# Altium PCB Circadian2-V2.PcbDoc
Units mm, origin at the board's own origin, x right, y up, seen from the top; angles counter-clockwise.
Board outline 27 x 50 mm, 2 copper layers (Top Layer, Bottom Layer), stack 0.571 mm thick; 30 components, 29 nets, 459 pads, 7 vias.
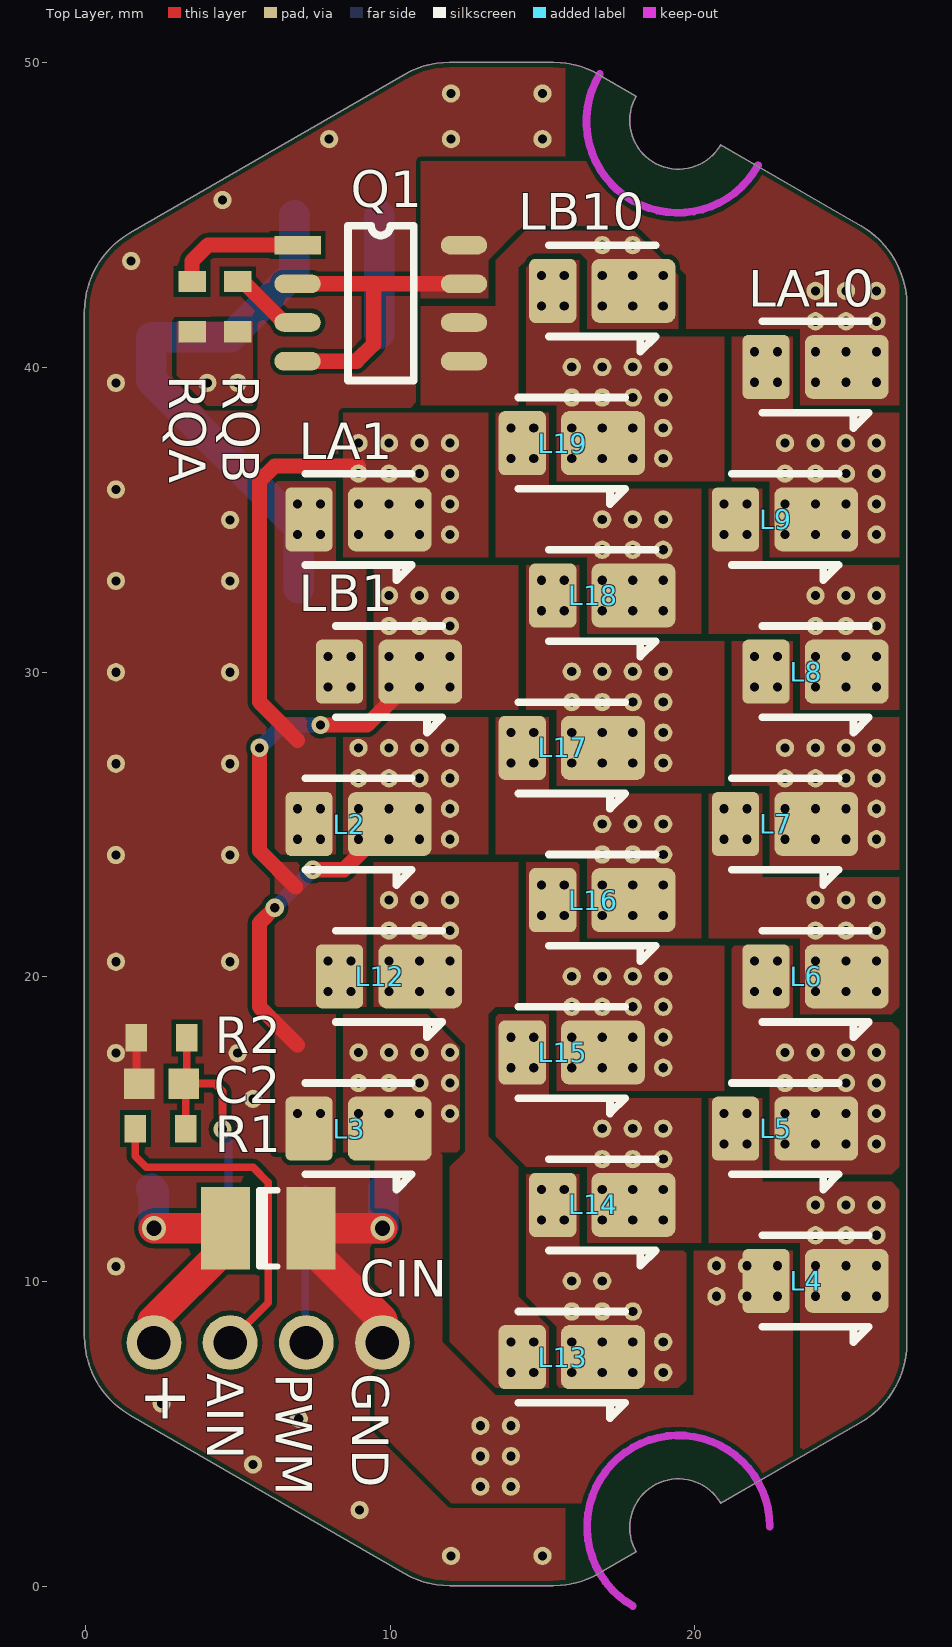
[diagram p0: Top Layer view]
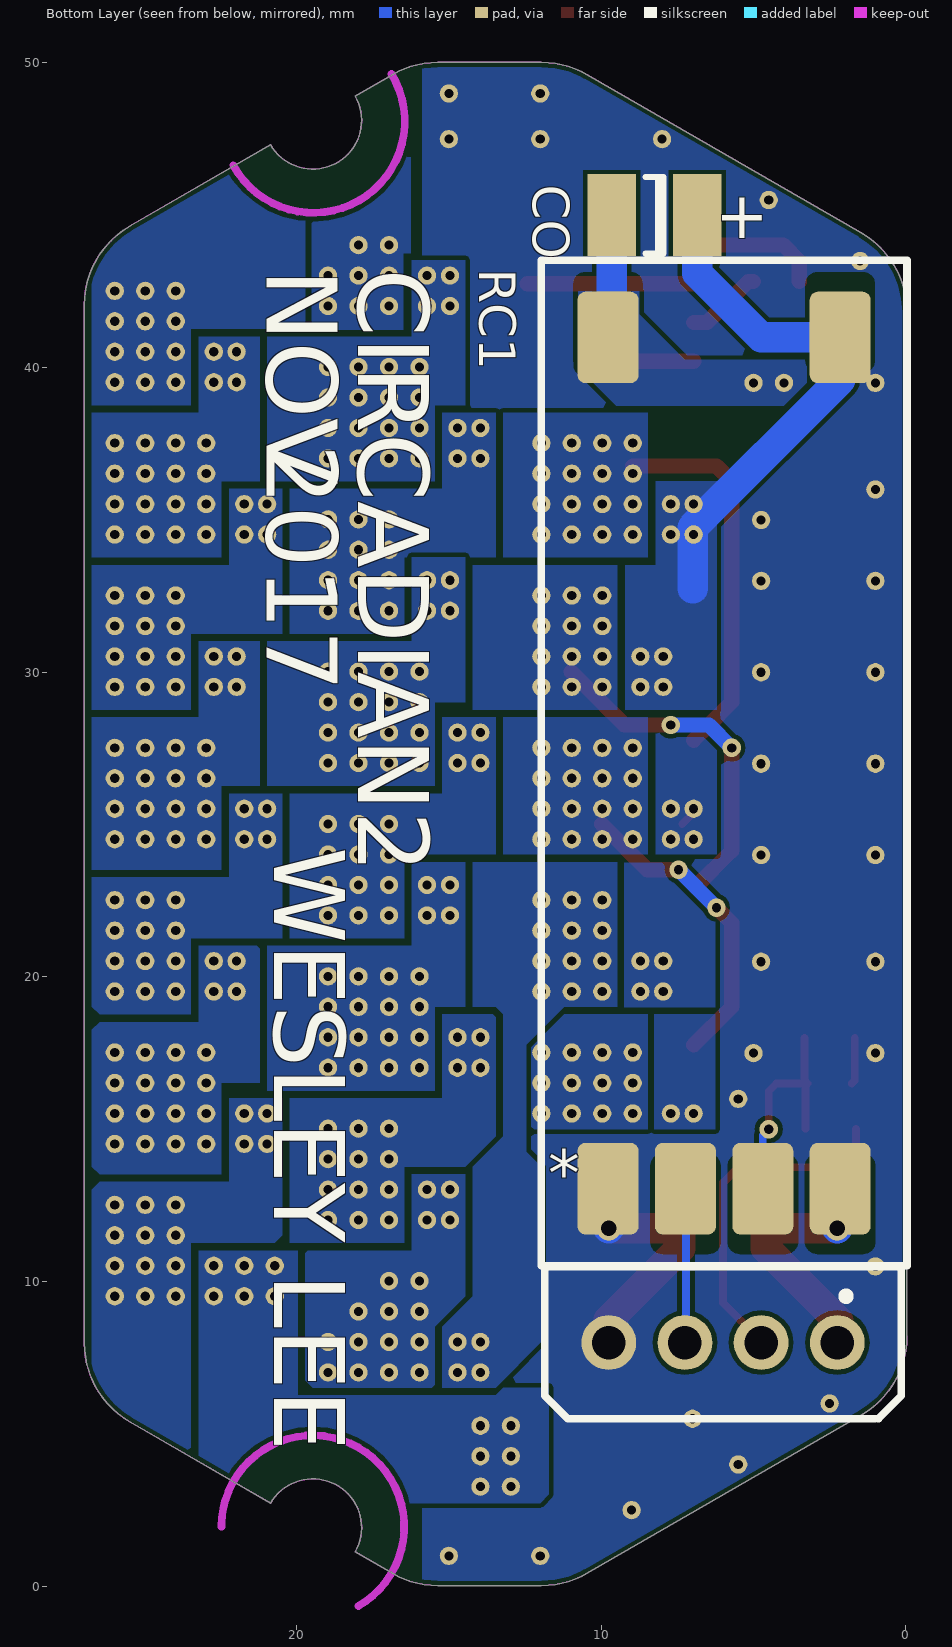
[diagram p1: Bottom Layer view, seen from below]
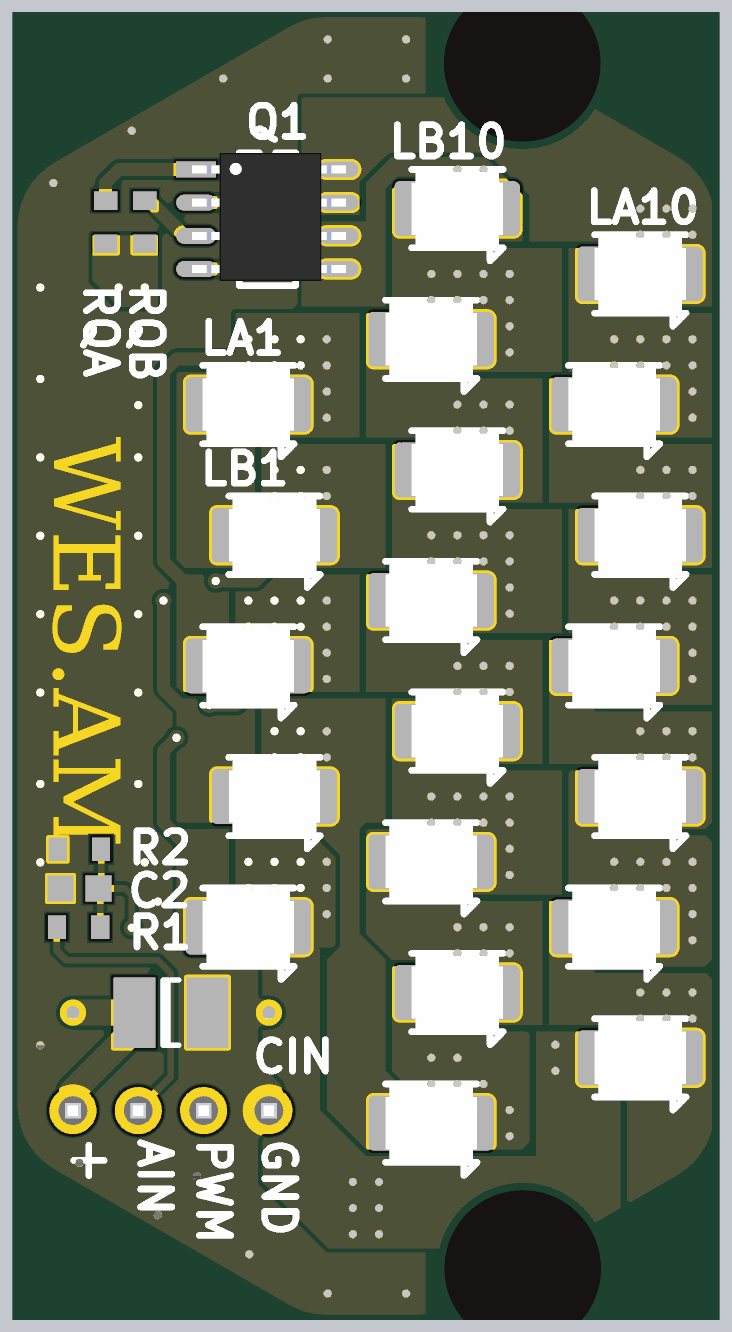
[diagram p2: 3D render of the assembled board from above, using the file's embedded part models]

## Layer stack, top to bottom
Top Solder: solder mask 0.0102, Solder Resist, Dk 3.5
Top Layer: signal copper 0.0356
Dielectric 1: dielectric 0.5, FR-4, Dk 4.8
Bottom Layer: signal copper 0.0356
Bottom Solder: solder mask 0.0102, Solder Resist, Dk 3.5

## Board outline
1.464,5.618 10.464,0.422 ccw(c11.964,3.02) 11.964,0.02 15.356,0.02 ccw(c15.356,3.02) 16.856,0.422 18.078,1.128 cw(c19.464,1.928) 20.85,2.728 25.464,5.392 ccw(c23.964,7.99) 26.964,7.99 26.964,42.051 ccw(c23.964,42.051) 25.464,44.649 20.85,47.313 cw(c19.464,48.113) 18.078,48.913 16.856,49.618 ccw(c15.356,47.02) 15.356,50.02 11.964,50.02 ccw(c11.964,47.02) 10.464,49.618 1.464,44.422 ccw(c2.964,41.824) -0.036,41.824 -0.036,8.217 ccw(c2.964,8.217)

## Design rules (kind name [scope] priority, off if disabled: settings)
Clearance [All] p1: gap=0.15
PolygonConnect [All] p1: connectstyle=Direct reliefconductorwidth=0.254 reliefentries=4 polygonreliefangle="90 Angle" airgapwidth=0.254
RoutingVias [All] p1: holewidth=0.3 width=0.3 viastyle="Through Hole" minholewidth=0.3 minwidth=0 maxholewidth=5 maxwidth=5
SolderMaskExpansion [All] p1: expansion=0.102 soldermaskfromhole=TRUE
Width [All] p1: maxlimit=1 minlimit=0.152 preferedwidth=0.254
30 further rules are at their usual default settings.

## Components (designator, comment, footprint, x,y, rotation, side; value= is the part's Value field where it differs from the comment)
* "PTSM 4 Way" "PTSM - 4 Way Vertical" 6,8 r180 bottom
C2 "100nF" CAP_SM0603_YAGEOCC2_N 2.5,16.5 r180 top
CIN "C1210" 1210 6,11.75 r0 top (schematic designator C1)
CO "C1210" 1210 8.25,45 r0 bottom
L2 "GW JTLPS1" E2835 8.964,25.02 r180 top
L3 "GW JTLPS1" E2835 8.964,15.02 r180 top
L4 "GW JTLPS1" E2835 23.964,10.02 r180 top
L5 "GW JTLPS1" E2835 22.964,15.02 r180 top
L6 "GW JTLPS1" E2835 23.964,20.02 r180 top
L7 "GW JTLPS1" E2835 22.964,25.02 r180 top
L8 "GW JTLPS1" E2835 23.964,30.02 r180 top
L9 "GW JTLPS1" E2835 22.964,35.02 r180 top
L12 "GW JTLPS1" E2835 9.964,20.02 r180 top
L13 "GW JTLPS1" E2835 15.964,7.52 r180 top
L14 "GW JTLPS1" E2835 16.964,12.52 r180 top
L15 "GW JTLPS1" E2835 15.964,17.52 r180 top
L16 "GW JTLPS1" E2835 16.964,22.52 r180 top
L17 "GW JTLPS1" E2835 15.964,27.52 r180 top
L18 "GW JTLPS1" E2835 16.964,32.52 r180 top
L19 "GW JTLPS1" E2835 15.964,37.52 r180 top
LA1 "GW JTLPS1" E2835 8.964,35.02 r180 top (schematic designator L1)
LA10 "GW JTLPS1" E2835 23.964,40.02 r180 top (schematic designator L10)
LB1 "GW JTLPS1" E2835 9.964,30.02 r180 top (schematic designator L11)
LB10 "LED" E2835 16.964,42.52 r180 top (schematic designator L20)
Q1 "NSS40301" SOIC8 6.964,44.02 r0 top
R1 "10R" RES_SM0603_YAGEORC_N 2.464,15.02 r180 top
R2 "10R" RES_SM0603_YAGEORC_N 2.5,18 r0 top
RC1 "RCD-24PL_01" RCD-24PL_01 5.964,27.02 r90 bottom locked
RQA "10R" RES_SM0603_YAGEORC_N 3.5,42 r90 top
RQB "10R" RES_SM0603_YAGEORC_N 5,42 r90 top

## Footprints (in the part's own frame and the unit in brackets; to place one, negate y for a bottom-side part, rotate by r counter-clockwise, add the part's x,y. Pads: shape width x height; smd on the part's side, far side on the other; paste and mask are expansions set on the pad)
1210 [mm] "Chip Capacitor; Body 3.2 x 2.5 mm (LxW typ)"
  rect 1.6x2.7 smd: 1(-1.4,0) 2(1.4,0)
  silkscreen extent -0.3,-1.25 0.3,1.25
CAP_SM0603_YAGEOCC2_N [mm] "Capacitor, Yageo CC Class2, SM0603, IPC Medium Density"
  rect 1x1 smd: 1(-0.727,0) 2(0.727,0)
  body extent -0.9,-0.5 0.9,0.5, height 0.9
E2835 [mm] "E2835"
  rrect25% 2.75x2.1 smd: 1(-1.025,0)
  rrect25% 1.55x2.1 smd: 2(1.625,0)
  silkscreen extent -1.75,-1.5 1.75,2, body extent -1.75,-1.4 1.75,1.4, height 0.65
"PTSM - 4 Way Vertical" [mm] "Through Hole 1778573"
  round 1.8 hole 1.1: 1(-3.75,0) 2(-1.25,0) 3(1.25,0) 4(3.75,0)
  silkscreen extent -5.85,-2.5 5.85,2.5, body extent -5.85,-4.3 5.85,4.3, height 8.7
RCD-24PL_01 [mm] "Recom LED Driver"
  rrect25% 3x2 smd: 1(-13.97,-3.81) 2(-13.97,-1.27) 3(-13.97,1.27) 4(-13.97,3.81) 5(13.97,-3.81) 6(13.97,3.81)
  silkscreen extent -17.63,-6 16.5,6, body extent -15.5,-5.7 15.5,5.7, height 5.6
RES_SM0603_YAGEORC_N [mm] "Resistor, Yageo RC_L, SM0603, IPC Medium Density"
  rect 0.7x0.9 smd: 1(-0.827,0) 2(0.827,0)
  body extent -0.85,-0.45 0.85,0.45, height 0.55
SOIC8 [mil]
  rect 60x24 smd: 1(0,0)
  oval 60x24 smd: 2(0,-50) 3(0,-100) 4(0,-150) 5(215,-150) 6(215,-100) 7(215,-50) 8(215,0)
  silkscreen extent 65,-175 150,25, body extent -6,-168 226,25, height 55

## Part data
C2: library part CC0603KRX7R9BB104, "CAP 100nF SM0603 X7R 50V YAGEO CC2"
CIN CO: "Ceramic Chip Capacitor - Standard"
L2 L3 L4 L5 L6 L7 L8 L9 L12 L13 L14 L15 L16 L17 L18 L19 LA1 LA10 LB1: library part "GW JTLPS1.CM LED", "Osram LED"
LB10: "Osram LED"
R1 R2 RQA RQB: library part RC0603FR-0710RL, "RES 10R SM0603 YAGEO RC_L"

## Free pads (board coordinates)
  round 0.6 hole 0.3: 2(8.964,24.52) 2(8.964,34.52) 2(9.964,24.52) 2(9.964,34.52) 2(15.964,7.02) 2(15.964,17.02) 2(15.964,27.02) 2(15.964,37.02) 2(16.964,7.02) 2(16.964,17.02) 2(16.964,27.02) 2(16.964,37.02) 2(22.964,14.52) 2(22.964,24.52) 2(22.964,34.52) 2(23.964,14.52) 2(23.964,24.52) 2(23.964,34.52) 3(10.964,24.52) 3(10.964,34.52) 3(17.964,7.02) 3(17.964,17.02) 3(17.964,27.02) 3(17.964,37.02) 3(18.964,27.02) 3(18.964,37.02) 3(24.964,14.52) 3(24.964,24.52) 3(24.964,34.52) 4(10.964,15.52) 4(10.964,25.52) 4(10.964,35.52) 4(17.964,8.02) 4(17.964,18.02) 4(17.964,28.02) 4(17.964,38.02) 4(18.964,28.02) 4(18.964,38.02) 4(24.964,15.52) 4(24.964,25.52) 4(24.964,35.52) 5(9.964,15.52) 5(9.964,25.52) 5(9.964,35.52) 5(16.964,8.02) 5(16.964,18.02) 5(16.964,28.02) 5(16.964,38.02) 5(23.964,15.52) 5(23.964,25.52) 5(23.964,35.52) 6(8.964,15.52) 6(8.964,25.52) 6(8.964,35.52) 6(15.964,8.02) 6(15.964,18.02) 6(15.964,28.02) 6(15.964,38.02) 6(22.964,15.52) 6(22.964,25.52) 6(22.964,35.52) 7(8.964,16.52) 7(8.964,26.52) 7(8.964,36.52) 7(15.964,9.02) 7(15.964,19.02) 7(15.964,29.02) 7(15.964,39.02) 7(22.964,16.52) 7(22.964,26.52) 7(22.964,36.52) 8(9.964,16.52) 8(9.964,26.52) 8(9.964,36.52) 8(16.964,9.02) 8(16.964,19.02) 8(16.964,29.02) 8(16.964,39.02) 8(23.964,16.52) 8(23.964,26.52) 8(23.964,36.52) 9(10.964,16.52) 9(10.964,26.52) 9(10.964,36.52) 9(17.964,9.02) 9(17.964,19.02) 9(17.964,29.02) 9(17.964,39.02) 9(18.964,29.02) 9(18.964,39.02) 9(24.964,16.52) 9(24.964,26.52) 9(24.964,36.52) 10(7.964,19.52) 10(7.964,29.52) 10(14.964,22.02) 10(14.964,32.02) 10(14.964,42.02) 11(7.964,20.52) 11(7.964,30.52) 11(14.964,23.02) 11(14.964,33.02) 11(14.964,43.02) 12(8.714,20.52) 12(8.714,30.52) 12(15.714,23.02) 12(15.714,33.02) 12(15.714,43.02) 13(8.714,19.52) 13(8.714,29.52) 13(15.714,22.02) 13(15.714,32.02) 13(15.714,42.02) 14(8.964,17.52) 14(8.964,27.52) 14(8.964,37.52) 14(15.964,10.02) 14(15.964,20.02) 14(15.964,30.02) 14(15.964,40.02) 14(21.964,19.52) 14(21.964,20.52) 14(21.964,29.52) 14(21.964,30.52) 14(21.964,39.52) 14(21.964,40.52) 14(22.714,19.52) 14(22.714,20.52) 14(22.714,29.52) 14(22.714,30.52) 14(22.714,39.52) 14(22.714,40.52) 14(22.964,17.52) 14(22.964,27.52) 14(22.964,37.52) 15(9.964,17.52) 15(9.964,27.52) 15(9.964,37.52) 15(16.964,10.02) 15(16.964,20.02) 15(16.964,30.02) 15(16.964,40.02) 15(23.964,17.52) 15(23.964,27.52) 15(23.964,37.52) 16(10.964,17.52) 16(10.964,27.52) 16(10.964,37.52) 16(11.964,15.52) 16(11.964,16.52) 16(11.964,17.52) 16(11.964,24.52) 16(11.964,25.52) 16(11.964,26.52) 16(11.964,27.52) 16(11.964,34.52) 16(11.964,35.52) 16(11.964,36.52) 16(11.964,37.52) 16(14.964,12.02) 16(14.964,13.02) 16(15.714,12.02) 16(15.714,13.02) 16(17.964,20.02) 16(17.964,30.02) 16(17.964,40.02) 16(18.964,7.02) 16(18.964,8.02) 16(18.964,17.02) 16(18.964,18.02) 16(18.964,19.02) 16(18.964,20.02) 16(18.964,30.02) 16(18.964,40.02) 16(24.964,17.52) 16(24.964,27.52) 16(24.964,37.52) 16(25.964,14.52) 16(25.964,15.52) 16(25.964,16.52) 16(25.964,17.52) 16(25.964,24.52) 16(25.964,25.52) 16(25.964,26.52) 16(25.964,27.52) 16(25.964,34.52) 16(25.964,35.52) 16(25.964,36.52) 16(25.964,37.52) 17(9.964,19.52) 17(9.964,29.52) 17(12.964,3.27) 17(12.964,4.27) 17(12.964,5.27) 17(13.964,3.27) 17(13.964,4.27) 17(13.964,5.27) 17(16.964,42.02) 17(16.964,12.02) 17(16.964,22.02) 17(16.964,32.02) 17(20.714,9.52) 17(20.714,10.52) 17(21.714,9.52) 17(21.714,10.52) 17(22.714,9.52) 17(22.714,10.52) 17(23.964,9.52) 17(23.964,19.52) 17(23.964,29.52) 17(23.964,39.52) 18(9.964,20.52) 18(9.964,30.52) 18(16.964,43.02) 18(16.964,13.02) 18(16.964,23.02) 18(16.964,33.02) 18(23.964,10.52) 18(23.964,20.52) 18(23.964,30.52) 18(23.964,40.52) 19(10.964,20.52) 19(10.964,30.52) 19(17.964,43.02) 19(17.964,13.02) 19(17.964,23.02) 19(17.964,33.02) 19(24.964,10.52) 19(24.964,20.52) 19(24.964,30.52) 19(24.964,40.52) 20(10.964,19.52) 20(10.964,29.52) 20(17.964,42.02) 20(17.964,12.02) 20(17.964,22.02) 20(17.964,32.02) 20(24.964,9.52) 20(24.964,19.52) 20(24.964,29.52) 20(24.964,39.52) 21(11.964,19.52) 21(11.964,29.52) 21(18.964,42.02) 21(18.964,12.02) 21(18.964,22.02) 21(18.964,32.02) 21(25.964,9.52) 21(25.964,19.52) 21(25.964,29.52) 21(25.964,39.52) 22(11.964,20.52) 22(11.964,30.52) 22(18.964,43.02) 22(18.964,13.02) 22(18.964,23.02) 22(18.964,33.02) 22(25.964,10.52) 22(25.964,20.52) 22(25.964,30.52) 22(25.964,40.52) 23(10.964,21.52) 23(10.964,31.52) 23(17.964,44.02) 23(17.964,14.02) 23(17.964,24.02) 23(17.964,34.02) 23(24.964,11.52) 23(24.964,21.52) 23(24.964,31.52) 23(24.964,41.52) 24(9.964,21.52) 24(9.964,31.52) 24(16.964,44.02) 24(16.964,14.02) 24(16.964,24.02) 24(16.964,34.02) 24(23.964,11.52) 24(23.964,21.52) 24(23.964,31.52) 24(23.964,41.52) 25(11.964,21.52) 25(11.964,31.52) 25(18.964,14.02) 25(18.964,24.02) 25(18.964,34.02) 25(25.964,11.52) 25(25.964,21.52) 25(25.964,31.52) 25(25.964,41.52) 26(6.964,15.52) 26(6.964,24.52) 26(6.964,25.52) 26(6.964,34.52) 26(6.964,35.52) 26(7.714,15.52) 26(7.714,24.52) 26(7.714,25.52) 26(7.714,34.52) 26(7.714,35.52) 26(9.964,22.52) 26(9.964,32.52) 26(14.714,27.02) 26(14.714,28.02) 26(14.714,17.02) 26(14.714,18.02) 26(14.714,37.02) 26(14.714,38.02) 26(16.964,15.02) 26(16.964,25.02) 26(16.964,35.02) 26(20.964,14.52) 26(20.964,15.52) 26(20.964,24.52) 26(20.964,25.52) 26(20.964,34.52) 26(20.964,35.52) 26(21.714,14.52) 26(21.714,15.52) 26(21.714,24.52) 26(21.714,25.52) 26(21.714,34.52) 26(21.714,35.52) 26(23.964,12.52) 26(23.964,22.52) 26(23.964,32.52) 26(23.964,42.52) 27(10.964,22.52) 27(10.964,32.52) 27(17.964,15.02) 27(17.964,25.02) 27(17.964,35.02) 27(24.964,12.52) 27(24.964,22.52) 27(24.964,32.52) 27(24.964,42.52) 28(11.964,22.52) 28(11.964,32.52) 28(18.964,15.02) 28(18.964,25.02) 28(18.964,35.02) 28(25.964,12.52) 28(25.964,22.52) 28(25.964,32.52) 28(25.964,42.52) 31(13.964,7.02) 31(13.964,17.02) 31(13.964,27.02) 31(13.964,37.02) 32(13.964,8.02) 32(13.964,18.02) 32(13.964,28.02) 32(13.964,38.02) 32(14.714,7.02) 32(14.714,8.02) 33(4,39.5) 34(5,39.5) 44(15,49) 45(12,49) 47(8,47.5) 48(4.5,45.5) 49(1.5,43.5) 50(1,39.5) 51(1,36) 52(1,33) 53(1,30) 54(1,27) 55(1,24) 56(1,20.5) 57(1,17.5) 58(1,10.5) 59(2.5,6) 60(5.5,4) 61(9,2.5) 62(12,1) 63(15,1) 64(7,5.5) 65(4.75,20.5) 66(4.75,24) 67(4.75,27) 68(4.75,30) 69(4.75,33) 70(4.75,35) 71(15,47.5) 72(12,47.5) 73(5,17.5) 74(5.5,16)

## Via types
v1: diameter 0.6, hole 0.3, Top Layer to Bottom Layer, tented both sides, 5 vias
v2: diameter 0.8, hole 0.5, Top Layer to Bottom Layer, 2 vias

## Nets (pads, with @x,y where several pads share a name; then routed paths per layer and width w, separated by ;. In a path a pad name is that pad's centre, name@x,y a point inside that pad or via, vN(x,y) a via of type N, cw(c..) or ccw(c..) an arc to the next point about the centre after c; other vN are vias at no path point)
AIN: *.3 R1.2 | length 11.4
  Top Layer w0.254: R1.2 1.637,14.113 2,13.75 5.5,13.75 6,13.25 6,9.306 *.3@4.714,8.02
GND: *.1 C2.2 CIN.2 pad.44 pad.45 pad.47 pad.48 pad.49 pad.50 pad.51 pad.52 pad.53 pad.54 pad.55 pad.56 pad.57 pad.58 pad.59 pad.60 pad.61 pad.62 pad.63 pad.64 pad.65 pad.66 pad.67 pad.68 pad.69 pad.70 pad.71 pad.72 pad.73 pad.74 R2.1 RC1.4 | length 9.9
  Top Layer w0.254: R2.1 1.673,16.6 C2.2
  Top Layer w1: *.1@9.714,8.02 9.714,8.714 9.75,8.75 7.4,11.1 CIN.2 v2(9.75,11.75)
  Bottom Layer w1: v2(9.75,11.75) 9.774,11.774 RC1.4
LEDVOUT+: CO.1 LA1.2 LB1.2 pad.10@7.964,29.52 pad.11@7.964,30.52 pad.12@8.714,30.52 pad.13@8.714,29.52 pad.26@6.964,34.52 pad.26@6.964,35.52 pad.26@7.714,34.52 pad.26@7.714,35.52 RC1.5 | length 17.7
  Bottom Layer w1: CO.1 6.85,43.1 4.75,41 2.164,41 RC1.5 2.154,39.596 7,34.75 7,32.75
LEDVOUT-: CO.2 pad.33 pad.34 RC1.6 RQA.1 RQB.1 | length 4.1
  Bottom Layer w0.254: RC1.6@9.65,41.114 RC1.6
  Bottom Layer w1: RC1.6@9.65,41.114 CO.2
NetC2_1: C2.1 R1.1 R2.2 RC1.2 | length 7.7
  Top Layer w0.254: R1.1 3.291,16.436 C2.1 ; R2.2 3.327,16.6 C2.1 ; v1(4.5,15) 4.5,16.25 4.25,16.5 C2.1
  Bottom Layer w0.254: v1(4.5,15) 4.694,14.806 RC1.2
NetL2_1: L2.1 L3.2 pad.2@8.964,24.52 pad.2@9.964,24.52 pad.3@10.964,24.52 pad.4@10.964,25.52 pad.5@9.964,25.52 pad.6@8.964,25.52 pad.7@8.964,26.52 pad.8@9.964,26.52 pad.9@10.964,26.52 pad.14@8.964,27.52 pad.15@9.964,27.52 pad.16@10.964,27.52 pad.16@11.964,24.52 pad.16@11.964,25.52 pad.16@11.964,26.52 pad.16@11.964,27.52 pad.26@6.964,15.52 pad.26@7.714,15.52 | length 10.1
  Top Layer w0.5: v1(6.214,22.27) 5.714,21.77 5.714,19.02 6.964,17.77 ; v1(7.464,23.52) 8.489,23.52 L2.1
  Bottom Layer w0.5: v1(6.214,22.27) v1(7.464,23.52)
NetL2_2: L2.2 LA1.1 pad.2@8.964,34.52 pad.2@9.964,34.52 pad.3@10.964,34.52 pad.4@10.964,35.52 pad.5@9.964,35.52 pad.6@8.964,35.52 pad.7@8.964,36.52 pad.8@9.964,36.52 pad.9@10.964,36.52 pad.14@8.964,37.52 pad.15@9.964,37.52 pad.16@10.964,37.52 pad.16@11.964,34.52 pad.16@11.964,35.52 pad.16@11.964,36.52 pad.16@11.964,37.52 pad.26@6.964,24.52 pad.26@6.964,25.52 pad.26@7.714,24.52 pad.26@7.714,25.52 | length 13.1
  Top Layer w0.254: L2.2@6.964,25.52 6.964,25.395 L2.2
  Top Layer w0.5: 6.964,27.77 6.464,28.27 5.714,29.02 5.714,36.27 6.214,36.77 pad.7@8.964,36.77
NetL3_1: L3.1 L4.2 pad.4@10.964,15.52 pad.5@9.964,15.52 pad.6@8.964,15.52 pad.7@8.964,16.52 pad.8@9.964,16.52 pad.9@10.964,16.52 pad.14@8.964,17.52 pad.15@9.964,17.52 pad.16@10.964,17.52 pad.16@11.964,15.52 pad.16@11.964,16.52 pad.16@11.964,17.52 pad.17@12.964,3.27 pad.17@12.964,4.27 pad.17@12.964,5.27 pad.17@13.964,3.27 pad.17@13.964,4.27 pad.17@13.964,5.27 pad.17@20.714,9.52 pad.17@20.714,10.52 pad.17@21.714,9.52 pad.17@21.714,10.52 pad.17@22.714,9.52 pad.17@22.714,10.52
NetL4_1: L4.1 L5.2 pad.17@23.964,9.52 pad.18@23.964,10.52 pad.19@24.964,10.52 pad.20@24.964,9.52 pad.21@25.964,9.52 pad.22@25.964,10.52 pad.23@24.964,11.52 pad.24@23.964,11.52 pad.25@25.964,11.52 pad.26@20.964,14.52 pad.26@20.964,15.52 pad.26@21.714,14.52 pad.26@21.714,15.52 pad.26@23.964,12.52 pad.27@24.964,12.52 pad.28@25.964,12.52
NetL5_1: L5.1 L6.2 pad.2@22.964,14.52 pad.2@23.964,14.52 pad.3@24.964,14.52 pad.4@24.964,15.52 pad.5@23.964,15.52 pad.6@22.964,15.52 pad.7@22.964,16.52 pad.8@23.964,16.52 pad.9@24.964,16.52 pad.14@21.964,19.52 pad.14@21.964,20.52 pad.14@22.714,19.52 pad.14@22.714,20.52 pad.14@22.964,17.52 pad.15@23.964,17.52 pad.16@24.964,17.52 pad.16@25.964,14.52 pad.16@25.964,15.52 pad.16@25.964,16.52 pad.16@25.964,17.52
NetL6_1: L6.1 L7.2 pad.17@23.964,19.52 pad.18@23.964,20.52 pad.19@24.964,20.52 pad.20@24.964,19.52 pad.21@25.964,19.52 pad.22@25.964,20.52 pad.23@24.964,21.52 pad.24@23.964,21.52 pad.25@25.964,21.52 pad.26@20.964,24.52 pad.26@20.964,25.52 pad.26@21.714,24.52 pad.26@21.714,25.52 pad.26@23.964,22.52 pad.27@24.964,22.52 pad.28@25.964,22.52
NetL7_1: L7.1 L8.2 pad.2@22.964,24.52 pad.2@23.964,24.52 pad.3@24.964,24.52 pad.4@24.964,25.52 pad.5@23.964,25.52 pad.6@22.964,25.52 pad.7@22.964,26.52 pad.8@23.964,26.52 pad.9@24.964,26.52 pad.14@21.964,29.52 pad.14@21.964,30.52 pad.14@22.714,29.52 pad.14@22.714,30.52 pad.14@22.964,27.52 pad.15@23.964,27.52 pad.16@24.964,27.52 pad.16@25.964,24.52 pad.16@25.964,25.52 pad.16@25.964,26.52 pad.16@25.964,27.52
NetL8_1: L8.1 L9.2 pad.17@23.964,29.52 pad.18@23.964,30.52 pad.19@24.964,30.52 pad.20@24.964,29.52 pad.21@25.964,29.52 pad.22@25.964,30.52 pad.23@24.964,31.52 pad.24@23.964,31.52 pad.25@25.964,31.52 pad.26@20.964,34.52 pad.26@20.964,35.52 pad.26@21.714,34.52 pad.26@21.714,35.52 pad.26@23.964,32.52 pad.27@24.964,32.52 pad.28@25.964,32.52
NetL9_1: L9.1 LA10.2 pad.2@22.964,34.52 pad.2@23.964,34.52 pad.3@24.964,34.52 pad.4@24.964,35.52 pad.5@23.964,35.52 pad.6@22.964,35.52 pad.7@22.964,36.52 pad.8@23.964,36.52 pad.9@24.964,36.52 pad.14@21.964,39.52 pad.14@21.964,40.52 pad.14@22.714,39.52 pad.14@22.714,40.52 pad.14@22.964,37.52 pad.15@23.964,37.52 pad.16@24.964,37.52 pad.16@25.964,34.52 pad.16@25.964,35.52 pad.16@25.964,36.52 pad.16@25.964,37.52
NetL12_1: L12.1 L13.2 pad.17@9.964,19.52 pad.18@9.964,20.52 pad.19@10.964,20.52 pad.20@10.964,19.52 pad.21@11.964,19.52 pad.22@11.964,20.52 pad.23@10.964,21.52 pad.24@9.964,21.52 pad.25@11.964,21.52 pad.26@9.964,22.52 pad.27@10.964,22.52 pad.28@11.964,22.52 pad.31@13.964,7.02 pad.32@13.964,8.02 pad.32@14.714,7.02 pad.32@14.714,8.02
NetL12_2: L12.2 LB1.1 pad.10@7.964,19.52 pad.11@7.964,20.52 pad.12@8.714,20.52 pad.13@8.714,19.52 pad.17@9.964,29.52 pad.18@9.964,30.52 pad.19@10.964,30.52 pad.20@10.964,29.52 pad.21@11.964,29.52 pad.22@11.964,30.52 pad.23@10.964,31.52 pad.24@9.964,31.52 pad.25@11.964,31.52 pad.26@9.964,32.52 pad.27@10.964,32.52 pad.28@11.964,32.52 | length 11.4
  Top Layer w0.5: v1(5.714,27.52) 5.714,24.143 6.901,22.957 ; v1(7.714,28.27) 9.239,28.27 LB1.1
  Bottom Layer w0.5: v1(5.714,27.52) 6.464,28.27 v1(7.714,28.27)
NetL13_1: L13.1 L14.2 pad.2@15.964,7.02 pad.2@16.964,7.02 pad.3@17.964,7.02 pad.4@17.964,8.02 pad.5@16.964,8.02 pad.6@15.964,8.02 pad.7@15.964,9.02 pad.8@16.964,9.02 pad.9@17.964,9.02 pad.14@15.964,10.02 pad.15@16.964,10.02 pad.16@14.964,12.02 pad.16@14.964,13.02 pad.16@15.714,12.02 pad.16@15.714,13.02 pad.16@18.964,7.02 pad.16@18.964,8.02
NetL14_1: L14.1 L15.2 pad.17@16.964,12.02 pad.18@16.964,13.02 pad.19@17.964,13.02 pad.20@17.964,12.02 pad.21@18.964,12.02 pad.22@18.964,13.02 pad.23@17.964,14.02 pad.24@16.964,14.02 pad.25@18.964,14.02 pad.26@14.714,17.02 pad.26@14.714,18.02 pad.26@16.964,15.02 pad.27@17.964,15.02 pad.28@18.964,15.02 pad.31@13.964,17.02 pad.32@13.964,18.02
NetL15_1: L15.1 L16.2 pad.2@15.964,17.02 pad.2@16.964,17.02 pad.3@17.964,17.02 pad.4@17.964,18.02 pad.5@16.964,18.02 pad.6@15.964,18.02 pad.7@15.964,19.02 pad.8@16.964,19.02 pad.9@17.964,19.02 pad.10@14.964,22.02 pad.11@14.964,23.02 pad.12@15.714,23.02 pad.13@15.714,22.02 pad.14@15.964,20.02 pad.15@16.964,20.02 pad.16@17.964,20.02 pad.16@18.964,17.02 pad.16@18.964,18.02 pad.16@18.964,19.02 pad.16@18.964,20.02
NetL16_1: L16.1 L17.2 pad.17@16.964,22.02 pad.18@16.964,23.02 pad.19@17.964,23.02 pad.20@17.964,22.02 pad.21@18.964,22.02 pad.22@18.964,23.02 pad.23@17.964,24.02 pad.24@16.964,24.02 pad.25@18.964,24.02 pad.26@14.714,27.02 pad.26@14.714,28.02 pad.26@16.964,25.02 pad.27@17.964,25.02 pad.28@18.964,25.02 pad.31@13.964,27.02 pad.32@13.964,28.02
NetL17_1: L17.1 L18.2 pad.2@15.964,27.02 pad.2@16.964,27.02 pad.3@17.964,27.02 pad.3@18.964,27.02 pad.4@17.964,28.02 pad.4@18.964,28.02 pad.5@16.964,28.02 pad.6@15.964,28.02 pad.7@15.964,29.02 pad.8@16.964,29.02 pad.9@17.964,29.02 pad.9@18.964,29.02 pad.10@14.964,32.02 pad.11@14.964,33.02 pad.12@15.714,33.02 pad.13@15.714,32.02 pad.14@15.964,30.02 pad.15@16.964,30.02 pad.16@17.964,30.02 pad.16@18.964,30.02
NetL18_1: L18.1 L19.2 pad.17@16.964,32.02 pad.18@16.964,33.02 pad.19@17.964,33.02 pad.20@17.964,32.02 pad.21@18.964,32.02 pad.22@18.964,33.02 pad.23@17.964,34.02 pad.24@16.964,34.02 pad.25@18.964,34.02 pad.26@14.714,37.02 pad.26@14.714,38.02 pad.26@16.964,35.02 pad.27@17.964,35.02 pad.28@18.964,35.02 pad.31@13.964,37.02 pad.32@13.964,38.02
NetL19_1: L19.1 LB10.2 pad.2@15.964,37.02 pad.2@16.964,37.02 pad.3@17.964,37.02 pad.3@18.964,37.02 pad.4@17.964,38.02 pad.4@18.964,38.02 pad.5@16.964,38.02 pad.6@15.964,38.02 pad.7@15.964,39.02 pad.8@16.964,39.02 pad.9@17.964,39.02 pad.9@18.964,39.02 pad.10@14.964,42.02 pad.11@14.964,43.02 pad.12@15.714,43.02 pad.13@15.714,42.02 pad.14@15.964,40.02 pad.15@16.964,40.02 pad.16@17.964,40.02 pad.16@18.964,40.02
NetLA10_1: LA10.1 pad.17@23.964,39.52 pad.18@23.964,40.52 pad.19@24.964,40.52 pad.20@24.964,39.52 pad.21@25.964,39.52 pad.22@25.964,40.52 pad.23@24.964,41.52 pad.24@23.964,41.52 pad.25@25.964,41.52 pad.26@23.964,42.52 pad.27@24.964,42.52 pad.28@25.964,42.52 Q1.2 Q1.4 Q1.7 Q1.8 | length 10.2
  Top Layer w0.5: Q1.4 8.904,40.21 9.464,40.77 9.464,42.75 ; Q1.2 9.464,42.75 ; Q1.7 9.464,42.75
NetLB10_1: LB10.1 pad.17@16.964,42.02 pad.18@16.964,43.02 pad.19@17.964,43.02 pad.20@17.964,42.02 pad.21@18.964,42.02 pad.22@18.964,43.02 pad.23@17.964,44.02 pad.24@16.964,44.02 Q1.5 Q1.6
NetQ1_1: Q1.1 RQA.2 | length 4.4
  Top Layer w0.5: RQA.2 3.5,43.5 4.02,44.02 Q1.1
NetQ1_3: Q1.3 RQB.2 | length 2.5
  Top Layer w0.5: RQB.2 5.173,42.827 6.52,41.48 Q1.3
PWM: *.2 RC1.3 | length 5
  Bottom Layer w0.254: *.2@7.214,8.02 7.214,13.03 RC1.3
VIN: *.4 CIN.1 RC1.1 | length 8.4
  Top Layer w1: *.4@2.214,8.02 2.214,8.714 4.6,11.1 CIN.1 v2(2.25,11.75)
  Bottom Layer w1: RC1.1 2.25,12.954 v2(2.25,11.75)

## Polygon pours and split planes (outlines as drawn)
NetL4_1 on Top Layer "NETL4_1_L01_P000" (solid, remove dead copper, pour order 0): 23.464,4.27 23.464,11.27 20.464,11.27 20.464,11.52 20.464,16.02 22.214,16.02 22.214,13.27 26.464,13.27 26.714,13.02 26.714,4.27
NetL5_1 on Top Layer "NETL5_1_L01_P002" (solid, pour order 2): 22.464,13.52 22.464,16.52 21.214,16.52 21.214,21.02 23.214,21.02 23.214,18.52 26.464,18.52 26.714,18.27 26.714,13.77 26.464,13.52
NetL6_1 on Top Layer "NETL6_1_L01_P004" (solid, pour order 4): 23.464,18.77 26.464,18.77 26.714,19.02 26.714,23.27 22.214,23.27 22.214,26.02 20.464,26.02 20.464,21.27 23.464,21.27 23.464,18.77
NetL7_1 on Top Layer "NETL7_1_L01_P006" (solid, pour order 6): 22.464,23.52 26.714,23.52 26.714,28.52 23.214,28.52 23.214,31.02 21.464,31.02 21.214,31.02 21.214,26.27 22.464,26.27 22.464,23.52
NetL8_1 on Top Layer "NETL8_1_L01_P008" (solid, pour order 8): 23.464,28.77 26.714,28.77 26.714,33.52 22.214,33.52 22.214,36.02 20.464,36.02 20.464,31.27 23.464,31.27 23.464,28.77
NetL9_1 on Top Layer "NETL9_1_L01_P010" (solid, pour order 10): 26.714,33.77 26.714,38.52 23.214,38.52 23.214,41.02 21.214,41.02 21.214,36.27 22.464,36.27 22.464,33.77 26.714,33.77
NetLA10_1 on Top Layer "NETLA10_1_L01_P012" (solid, remove dead copper, pour order 12): 23.464,38.77 26.714,38.77 26.714,44.02 23.964,46.77 22.464,46.77 21.214,45.52 19.714,45.52 19.714,41.27 23.464,41.27
NetL13_1 on Top Layer "NETL13_1_L01_P014" (solid, remove dead copper, pour order 14): 14.464,13.52 14.464,9.52 15.464,8.52 15.464,6.52 19.464,6.52 19.714,6.77 19.714,11.02 16.214,11.02 16.214,13.52
NetL14_1 on Top Layer "NETL14_1_L01_P016" (solid, remove dead copper, pour order 16): 16.464,11.27 16.464,13.77 14.464,13.77 13.464,14.77 13.464,18.77 15.214,18.77 15.214,16.02 20.214,16.02 20.214,11.27
NetL15_1 on Top Layer "NETL15_1_L01_P018" (solid, remove dead copper, pour order 18): 15.464,16.27 20.964,16.27 20.964,21.02 16.214,21.02 16.214,23.77 14.464,23.77 14.464,19.02 15.464,19.02
NetL16_1 on Top Layer "NETL16_1_L01_P020" (solid, remove dead copper, pour order 20): 16.464,21.27 20.214,21.27 20.214,26.02 15.214,26.02 15.214,28.52 13.464,28.52 13.464,24.02 16.464,24.02 16.464,21.27
NetL17_1 on Top Layer "NETL17_1_L01_P022" (solid, remove dead copper, pour order 22): 15.464,26.27 20.964,26.27 20.964,31.02 16.214,31.02 16.214,33.52 14.464,33.52 14.464,28.77 15.464,28.77 15.464,26.27
NetL18_1 on Top Layer "NETL18_1_L01_P024" (solid, remove dead copper, pour order 24): 16.464,31.27 20.214,31.27 20.214,36.02 15.214,36.02 15.214,38.52 13.464,38.52 13.464,33.77 16.464,33.77 16.464,31.27
NetL19_1 on Top Layer "NETL19_1_L01_P026" (solid, remove dead copper, pour order 26): 15.464,36.27 20.964,36.27 20.964,41.02 16.214,41.02 16.214,43.52 14.714,43.52 14.464,43.27 14.464,38.77 15.464,38.77
NetL2_2 on Top Layer "NETL2_2_L01_P058" (solid, remove dead copper, pour order 58): 8.464,33.77 8.464,38.52 13.214,38.52 13.214,33.77 8.464,33.77
NetL12_2 on Top Layer "NETL12_2_L01_P060" (solid, remove dead copper, pour order 60): 9.464,28.77 9.464,33.52 14.214,33.52 14.214,28.77 9.464,28.77
NetL2_1 on Top Layer "NETL2_1_L01_P062" (solid, remove dead copper, pour order 62): 8.464,24.02 8.464,28.52 13.214,28.52 13.214,24.02
NetL12_1 on Top Layer "NETL12_1_L01_P064" (solid, remove dead copper, pour order 64): 9.464,19.02 14.214,19.02 14.214,23.77 9.464,23.77
NetL3_1 on Top Layer "NETL3_1_L01_P066" (solid, remove dead copper, pour order 66): 8.464,14.25 12.194,14.25 12.289,14.345 12.289,17.695 11.214,18.77 8.464,18.77
LEDVOUT+ on Top Layer "LEDVOUT+_L01_P068" (solid, remove dead copper, pour order 68): 9.214,28.77 9.214,33.52 8.214,33.52 8.214,36.27 6.214,36.27 6.214,28.77 9.214,28.77
NetL2_2 on Top Layer "NETL2_2_L01_P072" (solid, remove dead copper, pour order 72): 8.214,28.52 8.214,24.02 6.214,24.02 6.214,28.52 8.214,28.52
NetL3_1 on Top Layer "NETL3_1_L01_P090" (solid, remove dead copper, pour order 90): 19.964,11.02 23.214,11.02 23.214,4.52 23.214,3.27 22.671,2.728 12.007,2.728 9.5,5.234 9.5,14.25 11.714,14.25 11.714,8.02 13.464,6.27 19.964,6.27
NetL12_1 on Top Layer "NETL12_1_L01_P094" (solid, remove dead copper, pour order 94): 15.214,6.52 15.214,8.52 14.214,9.52 14.214,13.77 13.214,14.77 13.214,18.77 13.464,19.02 13.464,19.27 11.214,19.27 11.214,19.02 12.464,17.77 12.464,14.27 11.964,13.77 11.964,8.02 13.464,6.52
NetLB10_1 on Top Layer "NETLB10_1_L01_P100" (solid, remove dead copper, pour order 100): 19.464,41.27 19.464,43.036 18,44.5 14.444,44.5 13.464,43.52 13.464,42.02 11,42.02 11,38.77 14.214,38.77 14.214,43.27 14.694,43.75 16.234,43.75 16.464,43.52 16.464,41.27
NetLA10_1 on Top Layer "NETLA10_1_L01_P102" (solid, remove dead copper, pour order 102): 19.964,42.786 18.23,44.52 14.214,44.52 13.214,43.52 13.214,42.27 11,42.27 11,46.77 17.76,46.77 19.964,44.566
NetL12_2 on Top Layer "NETL12_2_L01_P104" (solid, remove dead copper, pour order 104): 9.214,23.52 9.214,23.77 6.214,23.77 6.214,19.02 9.214,19.02 9.214,23.52
NetL2_1 on Top Layer "NETL2_1_L01_P106" (solid, remove dead copper, pour order 106): 8.214,18.77 8.214,14.25 6.214,14.25 6.214,18.77
LEDVOUT- on Top Layer "LEDVOUT-_L01_P116" (solid, remove dead copper, pour order 116): 3,41.5 3,39.75 4,38.75 5.5,38.75 5.5,41.5 3,41.5
GND on Top Layer "GND_L01_P118" (solid, remove dead copper, pour order 118): 15.75,51.25 -4,51.25 -4,-2.25 15.75,-2.25 15.75,51.25
NetL15_1 on Bottom Layer "NETL15_1_L02_P030" (solid, pour order 30): 15.464,16.27 20.964,16.27 20.964,21.02 16.214,21.02 16.214,23.77 14.464,23.77 14.464,19.02 15.464,19.02
NetL17_1 on Bottom Layer "NETL17_1_L02_P032" (solid, pour order 32): 15.464,26.27 20.964,26.27 20.964,31.02 20.214,31.02 16.214,31.02 16.214,33.77 14.464,33.77 14.464,29.02 15.464,29.02 15.464,26.27
NetL19_1 on Bottom Layer "NETL19_1_L02_P034" (solid, remove dead copper, pour order 34): 15.464,36.27 20.964,36.27 20.964,41.02 16.214,41.02 16.214,43.52 14.464,43.52 14.464,38.77 15.464,38.77
NetL18_1 on Bottom Layer "NETL18_1_L02_P036" (solid, remove dead copper, pour order 36): 16.464,31.27 20.214,31.27 20.214,36.02 15.214,36.02 15.214,38.52 13.464,38.52 13.464,33.77 16.464,33.77 16.464,31.27
NetL14_1 on Bottom Layer "NETL14_1_L02_P038" (solid, remove dead copper, pour order 38): 16.464,11.27 16.464,13.77 14.464,13.77 13.464,14.77 13.464,18.77 15.214,18.77 15.214,16.02 20.214,16.02 20.214,11.27
NetL13_1 on Bottom Layer "NETL13_1_L02_P040" (solid, remove dead copper, pour order 40): 14.464,13.52 14.464,9.52 15.464,8.52 15.464,6.52 19.464,6.52 19.714,6.77 19.714,11.02 16.214,11.02 16.214,13.52
NetL4_1 on Bottom Layer "NETL4_1_L02_P042" (solid, remove dead copper, pour order 42): 23.464,4.27 23.464,11.27 20.714,11.27 20.464,11.52 20.464,16.02 22.214,16.02 22.214,13.27 26.464,13.27 26.714,13.02 26.714,4.27
NetL16_1 on Bottom Layer "NETL16_1_L02_P044" (solid, remove dead copper, pour order 44): 16.464,21.27 20.214,21.27 20.214,26.02 15.214,26.02 15.214,28.52 13.464,28.52 13.464,24.02 16.464,24.02 16.464,21.27
NetL5_1 on Bottom Layer "NETL5_1_L02_P046" (solid, pour order 46): 22.464,13.52 22.464,16.52 21.214,16.52 21.214,21.02 23.214,21.02 23.214,18.52 26.464,18.52 26.714,18.27 26.714,13.77 26.464,13.52
NetL6_1 on Bottom Layer "NETL6_1_L02_P048" (solid, pour order 48): 23.464,18.77 26.464,18.77 26.714,19.02 26.714,23.27 22.214,23.27 22.214,26.02 20.464,26.02 20.464,21.27 23.464,21.27 23.464,18.77
NetL7_1 on Bottom Layer "NETL7_1_L02_P050" (solid, pour order 50): 22.464,23.52 26.714,23.52 26.714,28.52 23.214,28.52 23.214,31.02 21.464,31.02 21.214,31.02 21.214,26.27 22.464,26.27 22.464,23.52
NetL8_1 on Bottom Layer "NETL8_1_L02_P052" (solid, pour order 52): 23.464,28.77 26.714,28.77 26.714,33.52 22.214,33.52 22.214,36.02 20.464,36.02 20.464,31.27 23.464,31.27 23.464,28.77
NetL9_1 on Bottom Layer "NETL9_1_L02_P054" (solid, pour order 54): 26.714,33.77 26.714,38.52 23.214,38.52 23.214,41.02 21.214,41.02 21.214,36.27 22.464,36.27 22.464,33.77 26.714,33.77
NetLA10_1 on Bottom Layer "NETLA10_1_L02_P056" (solid, remove dead copper, pour order 56): 23.464,38.77 26.714,38.77 26.714,44.02 23.964,46.77 22.464,46.77 21.214,45.52 19.714,45.52 19.714,41.27 23.464,41.27
NetL2_2 on Bottom Layer "NETL2_2_L02_P074" (solid, remove dead copper, pour order 74): 8.464,33.77 8.464,38.52 13.214,38.52 13.214,33.77 8.464,33.77
NetL12_2 on Bottom Layer "NETL12_2_L02_P076" (solid, remove dead copper, pour order 76): 9.464,28.77 9.464,33.52 14.214,33.52 14.214,28.77 9.464,28.77
NetL2_1 on Bottom Layer "NETL2_1_L02_P078" (solid, remove dead copper, pour order 78): 8.464,24.02 8.464,28.52 13.214,28.52 13.214,24.02
NetL12_1 on Bottom Layer "NETL12_1_L02_P080" (solid, remove dead copper, pour order 80): 9.464,19.02 14.214,19.02 14.214,23.77 9.464,23.77
NetL3_1 on Bottom Layer "NETL3_1_L02_P082" (solid, remove dead copper, pour order 82): 8.464,15 12.289,15 12.289,17.695 11.214,18.77 8.464,18.77
LEDVOUT+ on Bottom Layer "LEDVOUT+_L02_P084" (solid, remove dead copper, pour order 84): 9.214,28.77 9.214,33.52 8.214,33.52 8.214,36.27 6.214,36.27 6.214,28.77 9.214,28.77
NetL2_2 on Bottom Layer "NETL2_2_L02_P086" (solid, remove dead copper, pour order 86): 8.214,28.52 8.214,24.02 6.214,24.02 6.214,28.52 8.214,28.52
NetL12_1 on Bottom Layer "NETL12_1_L02_P096" (solid, remove dead copper, pour order 96): 15.214,6.52 15.214,8.52 14.214,9.52 14.214,13.77 13.214,14.77 13.214,18.77 13.464,19.02 13.464,19.27 11.214,19.27 11.214,19.02 12.464,17.77 12.464,14.27 11.964,13.77 11.964,8.02 13.464,6.52
NetL3_1 on Bottom Layer "NETL3_1_L02_P098" (solid, remove dead copper, pour order 98): 19.964,11.02 23.214,11.02 23.214,4.52 23.214,3.27 22.671,2.728 12.007,2.728 11.714,3.02 11.714,6.52 13.214,6.52 13.464,6.27 19.964,6.27
LEDVOUT- on Bottom Layer "LEDVOUT-_L02_P114" (solid, remove dead copper, pour order 114): 10.75,42.5 10.75,40 9.5,38.75 4,38.75 3.25,39.5 3.25,40.25 7.25,40.25 8.75,41.75 8.75,42.5
GND on Bottom Layer "GND_L02_P124" (solid, remove dead copper, pour order 124): 15.877,51.23 -3.873,51.23 -3.873,-2.27 15.877,-2.27 15.877,51.23
NetL12_2 on Bottom Layer "NETL12_2_L02_P120" (solid, remove dead copper, pour order 120): 9.25,19 9.25,23.75 6.25,23.75 6.25,19 9.25,19
NetL2_1 on Bottom Layer "NETL2_1_L02_P122" (solid, remove dead copper, pour order 122): 6.25,15 6.25,18.77 8.25,18.77 8.25,15
NetLB10_1 on Bottom Layer "NETLB10_1_L02_P182" (solid, remove dead copper, pour order 182): 19.5,41.25 19.5,45 19.5,47 16.25,47 16.25,44 16.25,43.75 16.5,43.75 16.5,41.25 19.5,41.25

## Keep-outs
Keep-Out Layer:
  lines w0.013: -0.036,8.217 ccw(c2.964,8.217) 1.464,5.618 10.464,0.422 ccw(c11.964,3.02) 11.964,0.02 15.356,0.02 ccw(c15.356,3.02) 16.856,0.422 18.078,1.128 cw(c19.464,1.928) 20.85,2.728 25.464,5.392 ccw(c23.964,7.99) 26.964,7.99 26.964,42.051 ccw(c23.964,42.051) 25.464,44.649 20.85,47.313 cw(c19.464,48.113) 18.078,48.913 16.856,49.618 ccw(c15.356,47.02) 15.356,50.02 11.964,50.02 ccw(c11.964,47.02) 10.464,49.618 1.464,44.422 ccw(c2.964,41.824) -0.036,41.824 -0.036,8.217
  lines w0.254: 16.882,49.639 ccw(c19.446,48.082) 22.077,46.64 ; 17.964,-0.644 cw(c19.464,1.954) 22.464,1.954

## Silkscreen, mask and mechanical layers (free items; w line width, h text height)
Top Overlay:
  text "AIN" at 4,7 h1.2 r270
  text "PWM" at 6.25,7 h1.2 r270
  text "GND" at 8.75,7 h1.2 r270
  text "+" at 1.75,5.5 h1.52
Bottom Overlay:
  text "+" at 4.5,44.25 h1.52
  text "CIRCADIAN2" at 18.75,43.25 h4 r90
  text "NOV" at 21.75,43.25 h4 r90
  text "2017" at 21.75,37.5 h4 r90
  text "WESLEY LEE" at 21.5,24.25 h4 r90
Top Solder:
  circle w3: c19.446,48.082 r1.5
  circle w3: c19.464,1.954 r1.5
  text "WES.AM" at 1.75,33.75 h5 r270
Bottom Solder:
  circle w3: c19.464,1.954 r1.5
  circle w3: c19.464,48.082 r1.5
Mechanical 2:
  the board outline again, w0.013
Mechanical 15:
  lines w1: 11.964,0.02 11.964,50.02